# Altium PCB main.PcbDoc
Units mil, origin at the board's own origin, x right, y up, seen from the top; angles counter-clockwise.
Board outline 2755.91 x 5249.61 mil, 2 copper layers (Top Layer, Bottom Layer); 12 components, 25 nets, 151 pads, 2 vias.
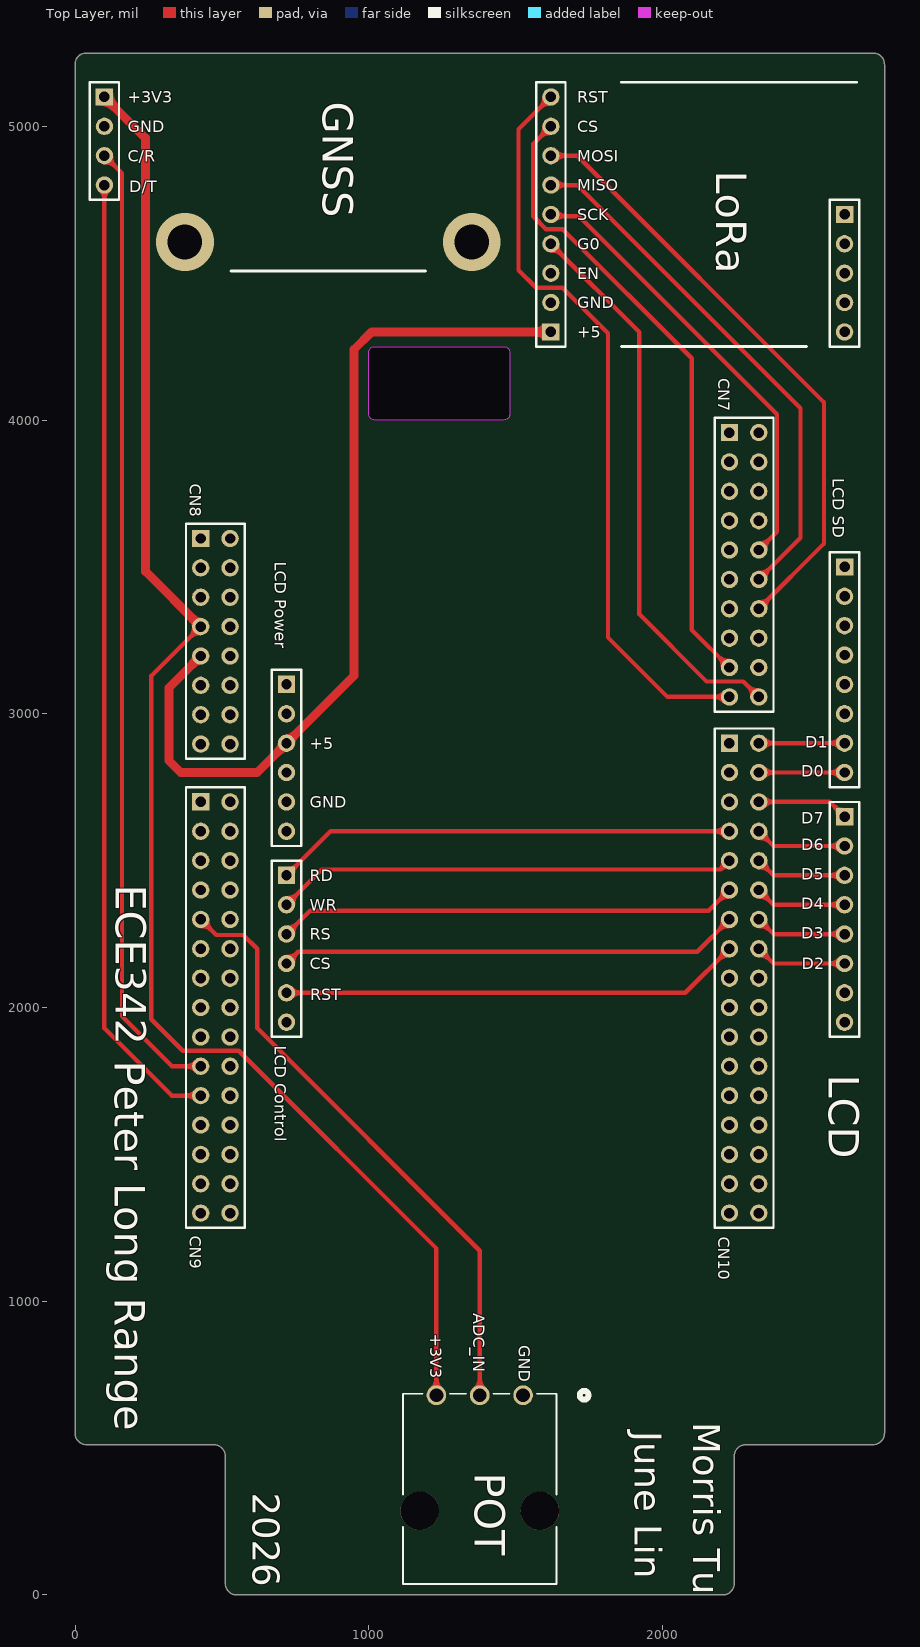
[diagram p0: Top Layer view]
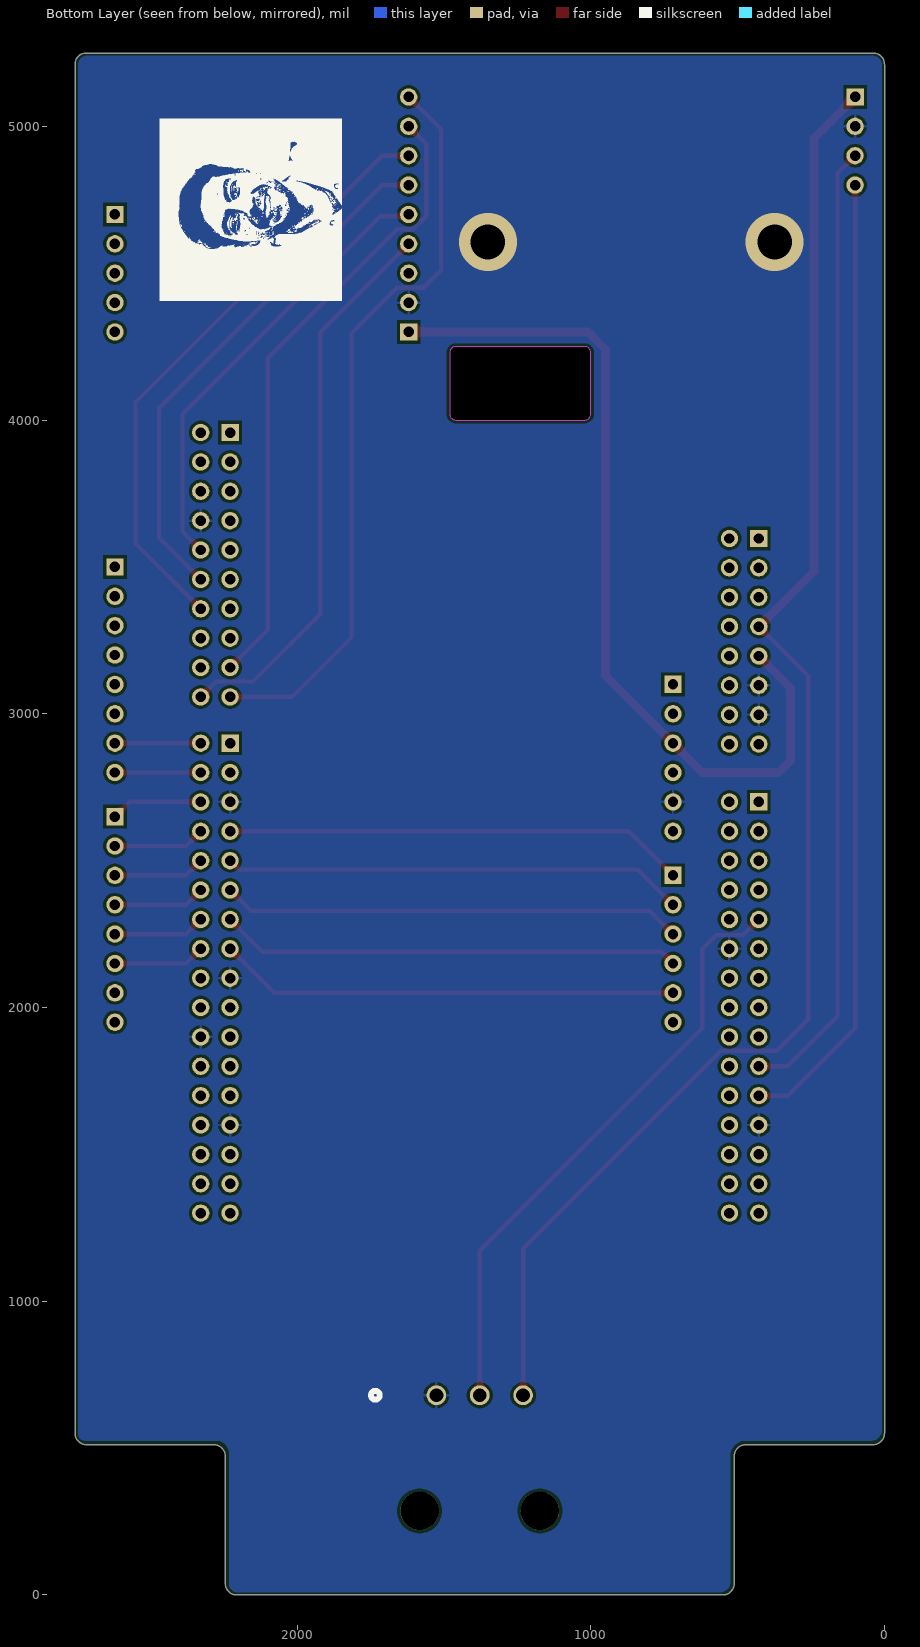
[diagram p1: Bottom Layer view, seen from below]

## Layer stack, top to bottom
Top Solder: solder mask 0.4, Solder Resist, Dk 3.5
Top Layer: signal copper 1.4
Dielectric 1: dielectric 12.6, FR-4, Dk 4.8
Bottom Layer: signal copper 1.4
Bottom Solder: solder mask 0.4, Solder Resist, Dk 3.5

## Board outline
472.44,511.81 cw(c472.44,472.44) 511.81,472.44 511.81,39.37 ccw(c551.18,39.37) 551.18,0 2204.72,0 ccw(c2204.72,39.37) 2244.09,39.37 2244.09,472.44 cw(c2283.46,472.44) 2283.46,511.81 2716.54,511.81 ccw(c2716.54,551.18) 2755.91,551.18 2755.91,5210.24 ccw(c2716.54,5210.24) 2716.54,5249.61 39.37,5249.61 ccw(c39.37,5210.24) 0,5210.24 0,551.18 ccw(c39.37,551.18) 39.37,511.81
cut-out: 1020,4250 1460,4250 cw(c1460,4230) 1480,4230 1480,4020 cw(c1460,4020) 1460,4000 1020,4000 cw(c1020,4020) 1000,4020 1000,4230 cw(c1020,4230)

## Design rules (kind name [scope] priority, off if disabled: settings)
BoardOutlineClearance [All] p1: gap=10 ignorepadtopadclearanceinfootprint=FALSE
Clearance [All] p1: gap=10 ignorepadtopadclearanceinfootprint=FALSE except(5: Arc-Arc Arc-Track Track-Track THPad-THPad)
HoleSize [All] p1: absolutevalues=TRUE maxlimit=248.03 minlimit=5.91 maxpercent=80.000 minpercent=20.000
MinimumSolderMaskSliver [All] p1: minsoldermaskwidth=3.94
NetAntennae [NOT IsVia] p1: netantennaetolerance=0
PolygonConnect PolygonConnect_MNT [IsVia AND InNet('GND')] p1: connectstyle=Direct reliefconductorwidth=10 reliefentries=4 polygonreliefangle="90 Angle" airgapwidth=10
PolygonConnect PolygonConnect_1 [All] p2: connectstyle=Relief reliefconductorwidth=10 reliefentries=4 polygonreliefangle="90 Angle" airgapwidth=10
RoutingVias [All] p1: holewidth=28 width=50 viastyle="Through Hole" minholewidth=28 minwidth=12 maxholewidth=28 maxwidth=24
SolderMaskExpansion [All] p1: expansion=4 istentingtop=FALSE
SupplyNets "Schematic Supply Nets_2" [InNet('+3V3')] p1: voltage=0.000
SupplyNets "Schematic Supply Nets_1" [InNet('+5')] p2: voltage=0.000
SupplyNets "Schematic Supply Nets" [InNet('GND')] p3: voltage=0.000
Width [All] p1: maxlimit=100 minlimit=5 preferedwidth=15 minimp=50.000000 maximp=50.000000 favimp=50.000000
27 further rules are at their usual default settings.

## Classes and differential pairs
component class main: CN7 CN8 CN9 CN10 GNSS LoRa

## Components (designator, comment, footprint, x,y, rotation, side; value= is the part's Value field where it differs from the comment)
CN7 "Header 10X2" HDR2X10 2227.95,3957.48 r270 top locked
CN8 "Header 8X2" HDR2X8 427.95,3596.85 r270 top
CN9 "Header 15X2" HDR2X15 427.95,2700 r270 top locked
CN10 "Header 17X2" HDR2X17 2227.95,2900 r270 top locked
GNSS "Header 4" HDR1X4 100,5100 r270 top
"LCD Control" "Header 6" HDR1X6 720,2450 r270 top (schematic designator LCD_Control)
"LCD Power" "Header 6" HDR1X6 720,3100 r270 top (schematic designator LCD_Power)
"LCD SD" "Header 8" HDR1X8 2620,3500 r270 top (schematic designator LCD_SD)
LCD_DX "Header 8" HDR1X8 2620,2650 r270 top
LoRa "Header 9" HDR1X9 1620,4300 r90 top
LoRa_G "Header 5" HDR1X5 2620,4700 r270 top
POT "P120PK-Y25BR10K" POT_P120PK-x25_TTE 1525.59,680 r180 top (schematic designator R1)

## Footprints (in the part's own frame and the unit in brackets; to place one, negate y for a bottom-side part, rotate by r counter-clockwise, add the part's x,y. Pads: shape width x height; smd on the part's side, far side on the other; paste and mask are expansions set on the pad)
HDR1X4 [mm] "Connector; Header; 4 Position"
  rect 1.5x1.5 hole 0.9: 1(0,0)
  round 1.5 hole 0.9: 2(2.54,0) 3(5.08,0) 4(7.62,0)
  silkscreen extent -1.27,-1.27 8.89,1.27
HDR1X5 [mm] "Connector; Header; 5 Position"
  rect 1.5x1.5 hole 0.9: 1(0,0)
  round 1.5 hole 0.9: 2(2.54,0) 3(5.08,0) 4(7.62,0) 5(10.16,0)
  silkscreen extent -1.27,-1.27 11.43,1.27
HDR1X6 [mm] "Connector; Header; 6 Position"
  rect 1.5x1.5 hole 0.9: 1(0,0)
  round 1.5 hole 0.9: 2(2.54,0) 3(5.08,0) 4(7.62,0) 5(10.16,0) 6(12.7,0)
  silkscreen extent -1.27,-1.27 13.97,1.27
HDR1X8 [mm] "Connector; Header; 8 Position"
  rect 1.5x1.5 hole 0.9: 1(0,0)
  round 1.5 hole 0.9: 2(2.54,0) 3(5.08,0) 4(7.62,0) 5(10.16,0) 6(12.7,0) 7(15.24,0) 8(17.78,0)
  silkscreen extent -1.27,-1.27 19.05,1.27
HDR1X9 [mm] "Connector; Header; 9 Position"
  rect 1.5x1.5 hole 0.9: 1(0,0)
  round 1.5 hole 0.9: 2(2.54,0) 3(5.08,0) 4(7.62,0) 5(10.16,0) 6(12.7,0) 7(15.24,0) 8(17.78,0) 9(20.32,0)
  silkscreen extent -1.27,-1.27 21.59,1.27
HDR2X8 [mm] "Connector; Header; 8x2 Position"
  rect 1.5x1.5 hole 0.9: 1(0,0)
  round 1.5 hole 0.9: 2(0,2.54) 3(2.54,0) 4(2.54,2.54) 5(5.08,0) 6(5.08,2.54) 7(7.62,0) 8(7.62,2.54) 9(10.16,0) 10(10.16,2.54) 11(12.7,0) 12(12.7,2.54) 13(15.24,0) 14(15.24,2.54) 15(17.78,0) 16(17.78,2.54)
  silkscreen extent -1.27,-1.27 19.05,3.81
HDR2X10 [mm] "Connector; Header; 10x2 Position"
  rect 1.5x1.5 hole 0.9: 1(0,0)
  round 1.5 hole 0.9: 2(0,2.54) 3(2.54,0) 4(2.54,2.54) 5(5.08,0) 6(5.08,2.54) 7(7.62,0) 8(7.62,2.54) 9(10.16,0) 10(10.16,2.54) 11(12.7,0) 12(12.7,2.54) 13(15.24,0) 14(15.24,2.54) 15(17.78,0) 16(17.78,2.54) 17(20.32,0) 18(20.32,2.54) 19(22.86,0) 20(22.86,2.54)
  silkscreen extent -1.27,-1.27 24.13,3.81
HDR2X15 [mm] "Connector; Header; 15x2 Position"
  rect 1.5x1.5 hole 0.9: 1(0,0)
  round 1.5 hole 0.9: 2(0,2.54) 3(2.54,0) 4(2.54,2.54) 5(5.08,0) 6(5.08,2.54) 7(7.62,0) 8(7.62,2.54) 9(10.16,0) 10(10.16,2.54) 11(12.7,0) 12(12.7,2.54) 13(15.24,0) 14(15.24,2.54) 15(17.78,0) 16(17.78,2.54) 17(20.32,0) 18(20.32,2.54) 19(22.86,0) 20(22.86,2.54) 21(25.4,0) 22(25.4,2.54) 23(27.94,0) 24(27.94,2.54) 25(30.48,0) 26(30.48,2.54) 27(33.02,0) 28(33.02,2.54) 29(35.56,0) 30(35.56,2.54)
  silkscreen extent -1.27,-1.27 36.83,3.81
HDR2X17 [mm] "Connector; Header; 17x2 Position"
  rect 1.5x1.5 hole 0.9: 1(0,0)
  round 1.5 hole 0.9: 2(0,2.54) 3(2.54,0) 4(2.54,2.54) 5(5.08,0) 6(5.08,2.54) 7(7.62,0) 8(7.62,2.54) 9(10.16,0) 10(10.16,2.54) 11(12.7,0) 12(12.7,2.54) 13(15.24,0) 14(15.24,2.54) 15(17.78,0) 16(17.78,2.54) 17(20.32,0) 18(20.32,2.54) 19(22.86,0) 20(22.86,2.54) 21(25.4,0) 22(25.4,2.54) 23(27.94,0) 24(27.94,2.54) 25(30.48,0) 26(30.48,2.54) 27(33.02,0) 28(33.02,2.54) 29(35.56,0) 30(35.56,2.54) 31(38.1,0) 32(38.1,2.54) 33(40.64,0) 34(40.64,2.54)
  silkscreen extent -1.27,-1.27 41.91,3.81
POT_P120PK-x25_TTE [mil]
  round 67 / inner round 60 / far side round 67 hole 47 paste-99999 mask+0: 1(0,0) 2(147.64,0) 3(295.28,0)
  round 131 / inner round 60 / far side round 131 hole 131 unplated paste-99999 mask+0: 4(-57.09,393.7) 5(352.36,393.7)
  silkscreen extent -223,-15 409,643

## Part data
CN7: "Header, 10-Pin, Dual row", LatestRevisionDate=17-Jul-2002, LatestRevisionNote="Re-released for DXP Platform.", Publisher="Altium Limited"
CN8: "Header, 8-Pin, Dual row", LatestRevisionDate=17-Jul-2002, LatestRevisionNote="Re-released for DXP Platform.", Publisher="Altium Limited"
CN9: "Header, 15-Pin, Dual row", LatestRevisionDate=17-Jul-2002, LatestRevisionNote="Re-released for DXP Platform.", Publisher="Altium Limited"
CN10: "Header, 17-Pin, Dual row", LatestRevisionDate=17-Jul-2002, LatestRevisionNote="Re-released for DXP Platform.", Publisher="Altium Limited"
GNSS: "Header, 4-Pin", LatestRevisionDate=17-Jul-2002, LatestRevisionNote="Re-released for DXP Platform.", Publisher="Altium Limited"
"LCD Control" "LCD Power": "Header, 6-Pin", LatestRevisionDate=17-Jul-2002, LatestRevisionNote="Re-released for DXP Platform.", Publisher="Altium Limited"
"LCD SD" LCD_DX: "Header, 8-Pin", LatestRevisionDate=17-Jul-2002, LatestRevisionNote="Re-released for DXP Platform.", Publisher="Altium Limited"
LoRa: "Header, 9-Pin", LatestRevisionDate=17-Jul-2002, LatestRevisionNote="Re-released for DXP Platform.", Publisher="Altium Limited"
LoRa_G: "Header, 5-Pin", LatestRevisionDate=17-Jul-2002, LatestRevisionNote="Re-released for DXP Platform.", Publisher="Altium Limited"
POT: "Description", Manufacturer_Name="TT Electronics", Copyright="Copyright (C) 2025 Ultra Librarian. All rights reserved.", Manufacturer_Part_Number=P120PK-Y25BR10K

## Via types
v1: diameter 196.85, hole 118.11, Top Layer to Bottom Layer, 2 vias

## Nets (pads, with @x,y where several pads share a name; then routed paths per layer and width w, separated by ;. In a path a pad name is that pad's centre, name@x,y a point inside that pad or via, vN(x,y) a via of type N, cw(c..) or ccw(c..) an arc to the next point about the centre after c; other vN are vias at no path point)
+3V3: CN8.7 GNSS.1 POT.3 | length 5138.6
  Top Layer w15: CN8.7 260,3128.9 260,1960 367.03,1852.97 557.03,1852.97 1230.32,1179.69 POT.3
  Top Layer w30: GNSS.1 240,4960 240,3484.8 CN8.7
+5: "LCD Power.3" CN8.9 LoRa.1 | length 2989.7
  Top Layer w30: CN8.9 320,3088.9 320,2840 360,2800 620,2800 720,2900 950,3130 950,4240 1010,4300 LoRa.1
ADC_IN: CN9.9 POT.2 | length 2067.4
  Top Layer w15: CN9.9 480.93,2247.03 572.97,2247.03 620,2200 620,1930 1377.95,1172.05 POT.2
C/R: CN9.19 GNSS.3 | length 3293.2
  Top Layer w15: GNSS.3 160,4840 160,1970 330,1800 CN9.19
CS: CN7.17 LoRa.8 | length 2177.1
  Top Layer w15: LoRa.8 1560,4940 1560,4693.49 1603.49,4650 1660,4650 2100,4210 2100,3285.43 CN7.17
D/T: CN9.21 GNSS.4 | length 3293.2
  Top Layer w15: GNSS.4 100,1930 330,1700 CN9.21
G0: CN7.20 LoRa.4 | length 1909.2
  Top Layer w15: LoRa.4 1921.42,4298.58 1921.42,3338.58 2150,3110 2275.43,3110 CN7.20
GND: "LCD Power.5" CN7.8 CN8.11 CN8.13 CN9.12 CN9.23 CN10.5 CN10.17 CN10.22 CN10.27 GNSS.2 LoRa.2 POT.1
  other v1: 374.02,4606.3 1350.39,4606.3
LCD_CS: "LCD Control.4" CN10.13 | length 1570.1
  Top Layer w15: 720,2150 760,2190 2117.95,2190 CN10.13
LCD_D0: "LCD SD.8" CN10.4 | length 292
  Top Layer w15: CN10.4 2620,2800
LCD_D1: "LCD SD.7" CN10.2 | length 292
  Top Layer w15: CN10.2 2620,2900
LCD_D2: CN10.16 LCD_DX.6 | length 312.8
  Top Layer w15: CN10.16 2377.95,2150 LCD_DX.6
LCD_D3: CN10.14 LCD_DX.5 | length 312.8
  Top Layer w15: CN10.14 2377.95,2250 LCD_DX.5
LCD_D4: CN10.12 LCD_DX.4 | length 312.8
  Top Layer w15: CN10.12 2377.95,2350 LCD_DX.4
LCD_D5: CN10.10 LCD_DX.3 | length 312.8
  Top Layer w15: CN10.10 2377.95,2450 LCD_DX.3
LCD_D6: CN10.8 LCD_DX.2 | length 312.8
  Top Layer w15: CN10.8 2377.95,2550 LCD_DX.2
LCD_D7: CN10.6 LCD_DX.1 | length 312.8
  Top Layer w15: CN10.6 2570,2700 LCD_DX.1
LCD_RD: "LCD Control.1" CN10.7 | length 1570.1
  Top Layer w15: 720,2450 870,2600 CN10.7
LCD_RS: "LCD Control.3" CN10.11 | length 1570.1
  Top Layer w15: 720,2250 720.81,2250 800.81,2330 2157.95,2330 CN10.11
LCD_RST: "LCD Control.5" CN10.15 | length 1570.1
  Top Layer w15: 720,2050 2077.95,2050 CN10.15
LCD_WR: "LCD Control.2" CN10.9 | length 1570.1
  Top Layer w15: 720,2350 840,2470 2197.14,2470 2227.14,2500 CN10.9
MISO: CN7.12 LoRa.6 | length 1806.2
  Top Layer w15: LoRa.6 1710,4800 2470,4040 2470,3599.53 CN7.12
MOSI: CN7.14 LoRa.7 | length 2072.4
  Top Layer w15: LoRa.7 1710,4900 2550,4060 2550,3579.53 CN7.14
RST: CN7.19 LoRa.9 | length 2561.7
  Top Layer w15: LoRa.9 1510,4990 1510,4510 1570,4450 1660,4450 1814.56,4295.44 1814.56,3260.08 2017.16,3057.48 CN7.19
SCK: CN7.10 LoRa.5 | length 1539.9
  Top Layer w15: LoRa.5 1625.82,4694.18 1715.82,4694.18 2390,4020 2390,3619.53 CN7.10
pads on no net: "LCD Control.6" "LCD Power.1" "LCD Power.2" "LCD Power.4" "LCD Power.6" "LCD SD.1" "LCD SD.2" "LCD SD.3" "LCD SD.4" "LCD SD.5" "LCD SD.6" CN7.1 CN7.2 CN7.3 CN7.4 CN7.5 CN7.6 CN7.7 CN7.9 CN7.11 CN7.13 CN7.15 CN7.16 CN7.18 CN8.1 CN8.2 CN8.3 CN8.4 CN8.5 CN8.6 CN8.8 CN8.10 CN8.12 CN8.14 CN8.15 CN8.16 CN9.1 CN9.2 CN9.3 CN9.4 CN9.5 CN9.6 CN9.7 CN9.8 CN9.10 CN9.11 CN9.13 CN9.14 CN9.15 CN9.16 CN9.17 CN9.18 CN9.20 CN9.22 CN9.24 CN9.25 CN9.26 CN9.27 CN9.28 CN9.29 CN9.30 CN10.1 CN10.3 CN10.18 CN10.19 CN10.20 CN10.21 CN10.23 CN10.24 CN10.25 CN10.26 CN10.28 CN10.29 CN10.30 CN10.31 CN10.32 CN10.33 CN10.34 LCD_DX.7 LCD_DX.8 LoRa.3 LoRa_G.1 LoRa_G.2 LoRa_G.3 LoRa_G.4 LoRa_G.5 POT.4 POT.5

## Polygon pours and split planes (outlines as drawn)
GND on Bottom Layer "GND_L02_P000" (solid, pour order 0): 40,5240 2715,5240 cw(c2715,5210) 2745,5210 2745,550 cw(c2720,550) 2720,525 2275,525 ccw(c2275,480) 2230,480 2230,35 cw(c2205,35) 2205,10 560,10 cw(c560,45) 525,45 525,475 ccw(c475,475) 475,525 44.96,525 cw(c44.95,559.95) 10,559.96 10,5210 cw(c40,5210)

## Silkscreen, mask and mechanical layers (free items; w line width, h text height)
Top Overlay:
  lines w10: 531.5,4507.87 1192.91,4507.87 ; 1860,4250 2490,4250 ; 1860,5150 2660,5150
  text "+3V3" at 180,5080 h39.37
  text "RST" at 1710,5080 h39.37
  text "GND" at 180,4980 h39.37
  text "CS" at 1710,4980 h39.37
  text "C/R" at 180,4880 h39.37
  text "MOSI" at 1710,4880 h39.37
  text "MISO" at 1710,4780 h39.37
  text "D/T" at 184.41,4775.91 h39.37
  text "SCK" at 1710,4680 h39.37
  text "G0" at 1710,4580 h39.37
  text "EN" at 1710,4480 h39.37
  text "GND" at 1710,4380 h39.37
  text "+5" at 1710,4280 h39.37
  text "D1" at 2485.57,2884.84 h39.37
  text "+5" at 800,2880 h39.37
  text "D0" at 2472.45,2784.84 h39.37
  text "GND" at 800,2680 h39.37
  text "D7" at 2472.45,2624.84 h39.37
  text "D6" at 2472.45,2534.84 h39.37
  text "D5" at 2472.45,2434.84 h39.37
  text "RD" at 800,2430 h39.37
  text "ECE342" at 104.44,2418.19 h177.17 r270
  text "D4" at 2472.45,2334.84 h39.37
  text "WR" at 800,2330 h39.37
  text "D3" at 2472.45,2234.84 h39.37
  text "RS" at 800,2230 h39.37
  text "CS" at 800,2130 h39.37
  text "D2" at 2474.4,2130 h39.37
  text "RST" at 801.2,2024.99 h39.37
  text "Peter Long Range" at 101.82,1818.19 h177.17 r270
  text "LCD" at 2531.99,1770.63 h177.17 r270
  text "ADC_IN" at 1356.56,960 h39.37 r270
  text "+3V3" at 1210,890 h39.37 r270
  text "GND" at 1510,850 h39.37 r270
  text "Morris Tu" at 2073.56,588.19 h157.48 r270
  text "June Lin" at 1874.14,558.19 h157.48 r270
  text "2026" at 574.14,348.19 h157.48 r270
Bottom Overlay:
  drawing of 368 lines, arcs and shapes, not listed
Mechanical 1:
  the board outline again, w10